# EAGLE board Pulse Earing 3 (EAGLE 6.4)
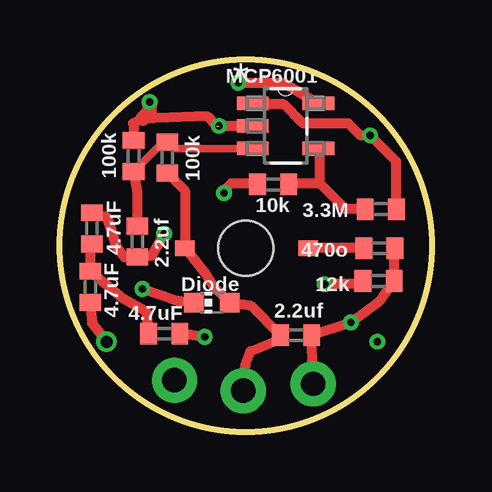
[diagram p0: board, top side]
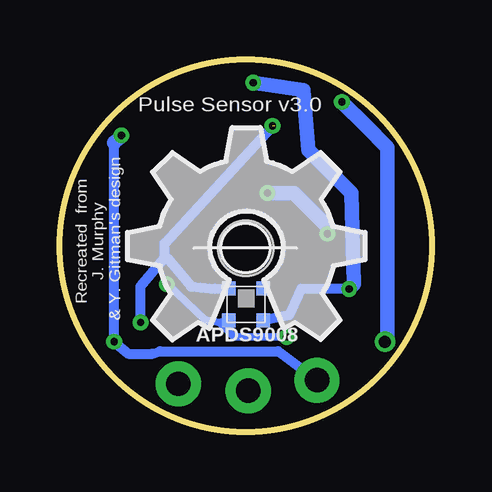
[diagram p1: board, bottom side, seen from below]

Size 15.5 x 15.5 mm. Coordinates in mm from the lower left corner, seen from the top.
Outline: circle at 7.75,7.75 radius 7.75
Copper layers (1*16): Top 0.0356mm / dielectric 1.5011mm / Bottom 0.0356mm
Design rules "LaenPCBOrder *": minimum track width 6mil, minimum drill 13mil, track to track 6mil, track to pad 6mil, pad to pad 6mil, via to via 6mil, smd to smd 6mil, copper to edge 15mil, drill to drill 6mil, minimum pad ring 7mil, minimum via ring 7mil, stop-mask expansion 4mil, vias tented up to drill 0.5mm, thermal gap 10mil

## Footprints (pad centres in the part's own frame; a part is rotated, then mirrored left to right if it is on the bottom)
1X01NS = drill 1.016 pad 1.88: 1 0,0
C0402 = smd 0.7 x 0.9: 1 -0.65,0; 2 0.65,0
CHIP-LED0603 = smd 0.8 x 0.8: A 0,-0.75; C 0,0.75
R0402 = smd 0.7 x 0.9: 1 -0.65,0; 2 0.65,0
SOT95P270X145-5N = smd 1.321 x 0.559: 1 -1.372,0.94; 2 -1.372,0; 3 -1.372,-0.94; 4 1.372,-0.94; 5 1.372,0.94
APDS9008 = smd 0.577 x 0.577: GND 0.08,-1.52; NCC1 0.08,-0.08; OUT 1.41,-1.52; VCC 1.41,-0.08
KBREVMNTLED = smd 0.8 x 0.65 bottom: GND 5.144,0; V+ 0,0 | hole 2.3: 2.54,0

## Placement (x,y rotation side)
+V  M01SMDNS  [1X01NS]  7.65,1.7 0 top
C1  2.2uf  [C0402]  9.85,4.02 0 top
C2  4.7uf  [C0402]  4.35,4.09 180 top
C3  4.7uf  [C0402]  1.33,8.48 90 top
C4  2.2uf  [C0402]  3.23,7.93 90 top
C5  4.7uf  [C0402]  1.27,6.04 270 top
GND  M01SMDNS  [1X01NS]  10.56,1.99 0 top
LED1  [CHIP-LED0603]  6.34,5.38 90 top
OUT  M01SMDNS  [1X01NS]  4.77,2.14 0 top
R1  10k  [R0402]  8.89,10.31 0 top
R2  100k  [R0402]  4.48,11.43 270 top
R3  100k  [R0402]  3.07,11.49 270 top
R4  12k  [R0402]  13.28,6.28 180 top
R5  470  [R0402]  13.32,7.65 180 top
R6  3.3m  [R0402]  13.38,9.28 0 top
U$1  MCP6001UT-E/OT  [SOT95P270X145-5N]  9.41,12.75 0 top
U$2  APDS9008  [APDS9008]  6.94,6.05 270 bottom
U$3  KBREVMTNLED  [KBREVMNTLED]  5.21,7.65 180 bottom
U$4  [OSHW_FILLX350_NOTEXT]  12.68,3.81 0 bottom

## Library data of the parts
+V GND OUT = SparkFun
C1-C5 R1-R6 = resistor
LED1 = led
U$1 = Random parts; MPN: MCP6001UT-E/OT; OC_FARNELL: 1840893; OC_NEWARK: 84R5183; PACKAGE: SOT23-5; SUPPLIER: Microchip
U$2 U$3 = Random parts
U$4 = ohw-logo

## Nets
+V: +V.1 C1.1 LED1.A R2.2 U$3.V+
N$1: LED1.C U$1.5 U$2.VCC
N$2: R1.2 R6.1 U$1.4
N$3: C2.1 R4.2 U$2.OUT
N$4: C2.2 C3.1 C5.1
N$5: C3.2 C4.1 R1.1
N$6: C4.2 R2.1 R3.2 U$1.3
N$7: R5.2 U$3.GND
N$8: C1.2 C5.2 GND.1 R3.1 R4.1 R5.1 U$1.2 U$2.GND
OUT: OUT.1 R6.2 U$1.1

## Tracks (layer width: path | path; a pad name or v marks a point on that pad's centre or on a via)
+V
  Top 0.406: R2.2 5.21,10.05 U$3.V+ 5.24,7.65 6.04,6.65 6.41,6.05 LED1.A 7.99,5.23 C1.1 9.11,3.82 7.94,3.35 7.74,2.8 +V.1
N$1  (via drill 0.3, 0.3 pad 0.3)
  Top 0.406: LED1.C 4.91,5.45 v3.44,5.95 | v7.44,14.55 9.32,14.55 U$1.5
  Bottom 0.406: v3.44,5.95 5.44,5.95 5.94,4.85 U$2.VCC
  Bottom 0.61: v7.44,14.55 5.34,14.25 5.14,11.75 3.34,9.95 3.24,6.15 v3.44,5.95
N$2
  Top 0.406: R6.1 11.91,9.28 10.84,10.35 | 10.84,10.35 9.59,10.35 R1.2 | 10.84,10.35 10.84,11.75 U$1.4
N$3  (via drill 0.3)
  Top 0.406: C2.1 5.43,4.05 v6.04,3.95 | R4.2 12.5,6.15 v11.04,6.15
  Bottom 0.305: v6.04,3.95 8.24,3.95 8.84,4.55 | 8.84,4.55 8.42,4.65 | 8.84,4.55 9.44,4.65 v11.04,6.15
  Bottom 0.406: 8.42,4.65 U$2.OUT
N$4
  Top 0.406: C3.1 1.27,7.79 C5.1 2.64,5.55 3.54,5.05 3.6,4.99 C2.2
N$5  (via drill 0.3)
  Top 0.305: 2.68,7.28 C4.1
  Top 0.406: C4.1 3.85,7.35 v4.34,8.25 | R1.1 8.2,10.35 7.14,10.35 6.84,10.05 v6.84,9.95 | C3.2 1.94,8.95 2.34,7.75 2.68,7.28
  Bottom 0.61: v6.84,9.95 5.74,9.95 4.34,8.55 v4.34,8.25
N$6
  Top 0.305: R3.2 4.31,12.08 R2.1 4.75,11.81 U$1.3
  Top 0.406: R3.2 3.23,9.99 C4.2
N$7
  Top 0.406: R5.2 U$3.GND
N$8  (via drill 0.3, 0.5)  (1 unrouted)
  Top 0.152: 1.4,5.21 C5.2
  Top 0.406: GND.1 C1.2 v12.14,4.55 13.34,5.45 R4.1 R5.1 | U$1.2 6.54,12.75 | 6.54,12.75 6.64,12.65 | 6.54,12.75 6.14,13.15 3.44,13.05 3.04,12.85 3.07,12.82 R3.1 | C5.2 1.34,4.52 v1.94,3.75
  Top 0.61: v3.74,13.75 3.74,13.35 3.44,13.05
  Bottom 0.152: 2.67,12.83 2.74,12.75
  Bottom 0.406: v12.14,4.55 12.14,6.05 11.14,7.25 | 11.14,7.25 11.04,7.25 10.04,6.05 9.04,5.95 U$2.GND | 11.14,7.25 11.14,7.85 v6.64,12.75 | 1.84,3.95 1.84,3.85 v1.94,3.75 1.94,3.55
  Bottom 0.61: 1.84,3.95 1.84,11.85 2.74,12.75 v3.74,13.75
OUT  (via drill 0.3, 0.3 pad 0.3)
  Top 0.406: R6.2 14.03,11.26 v12.94,12.35 12.54,12.35 12.04,12.85 10.14,12.85 9.34,13.65 8.08,13.65 U$1.1
  Bottom 0.406: 13.24,12.05 v13.24,3.75 12.64,3.25 11.64,3.25 11.34,3.35 6.39,3.35 OUT.1 | 13.04,12.25 v12.94,12.35
  Bottom 0.61: 13.24,12.05 13.04,12.25

## Text on the board
_tsilk: MCP6001 | 100k | 100k | 10k | 3.3M | 470o | 4.7uF | 2.2uf | Diode | 12k | 4.7uF | 4.7uF | 2.2uf
_bsilk: Pulse Sensor v3.0 | Recreated from / J. Murphy / & Y. Gitman's design | APDS9008